# Altium PCB LED_Emergency_warning_lights.PcbDoc
Units mm, origin at the board's own origin, x right, y up, seen from the top; angles counter-clockwise.
Board outline 40 x 20 mm, 2 copper layers (Top Layer, Bottom Layer), stack 1.57 mm thick; 9 components, 6 nets, 24 pads, 10 vias.
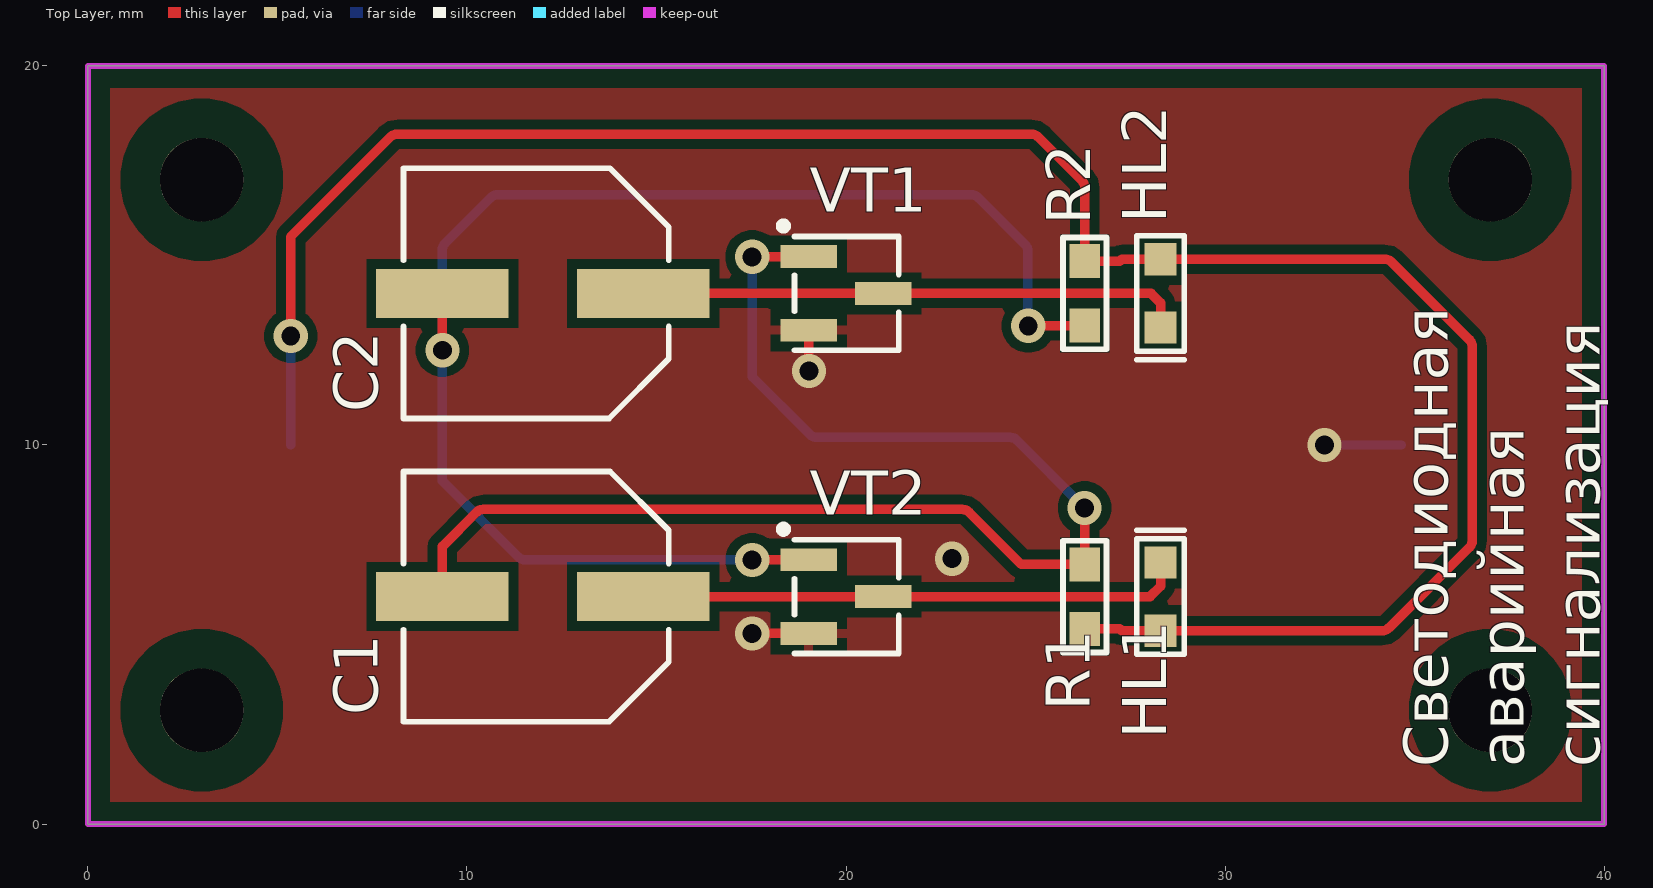
[diagram p0: Top Layer view]
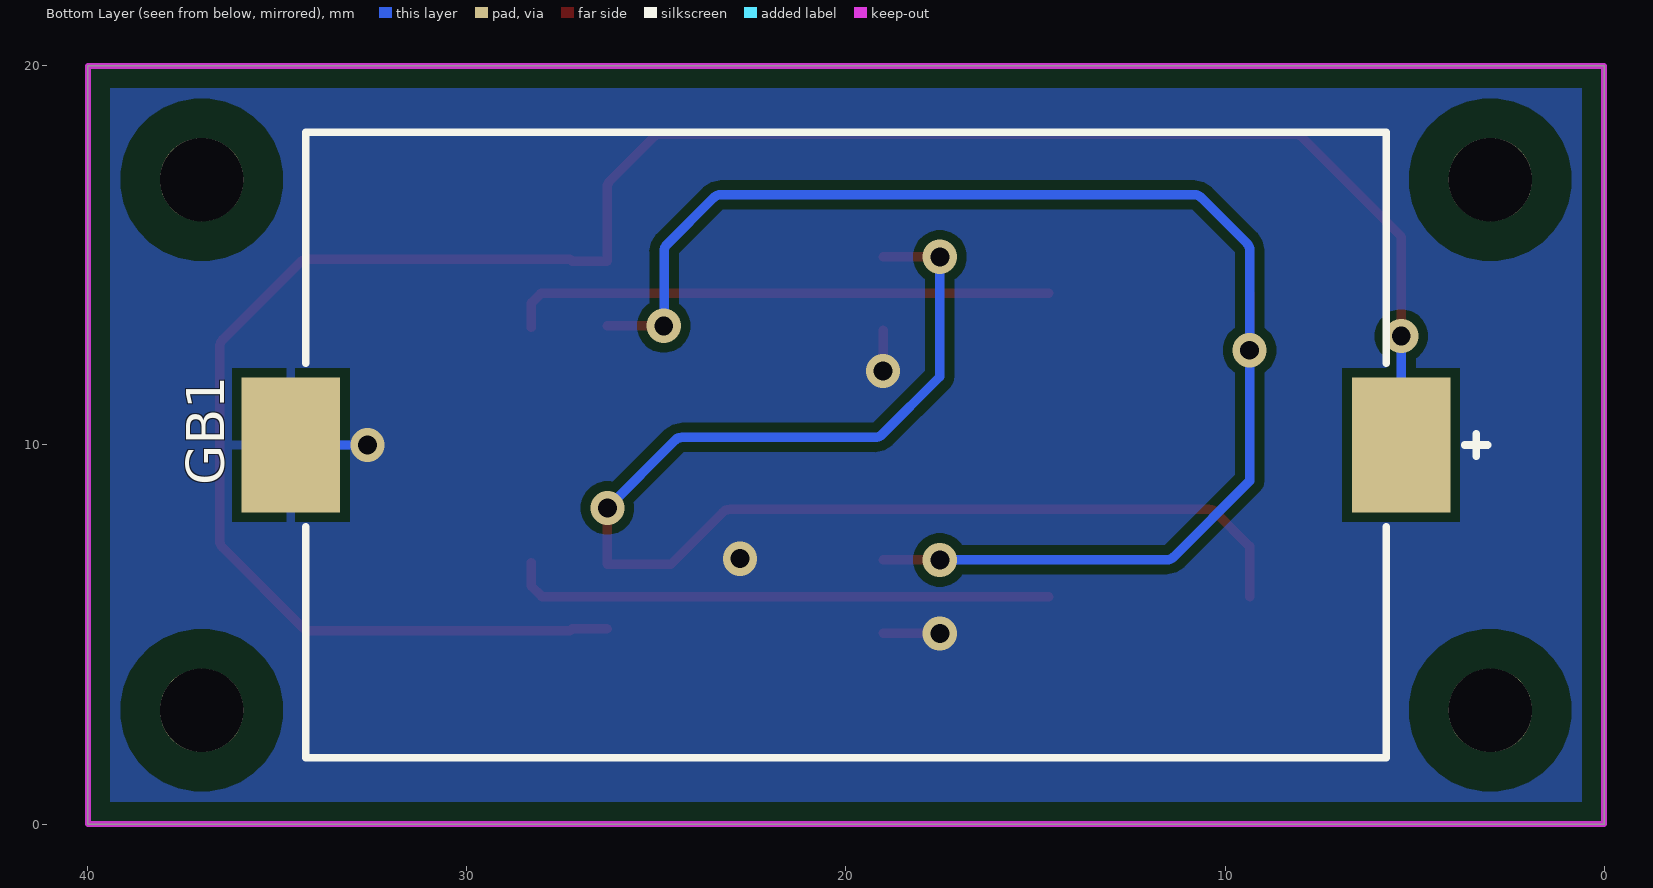
[diagram p1: Bottom Layer view, seen from below]
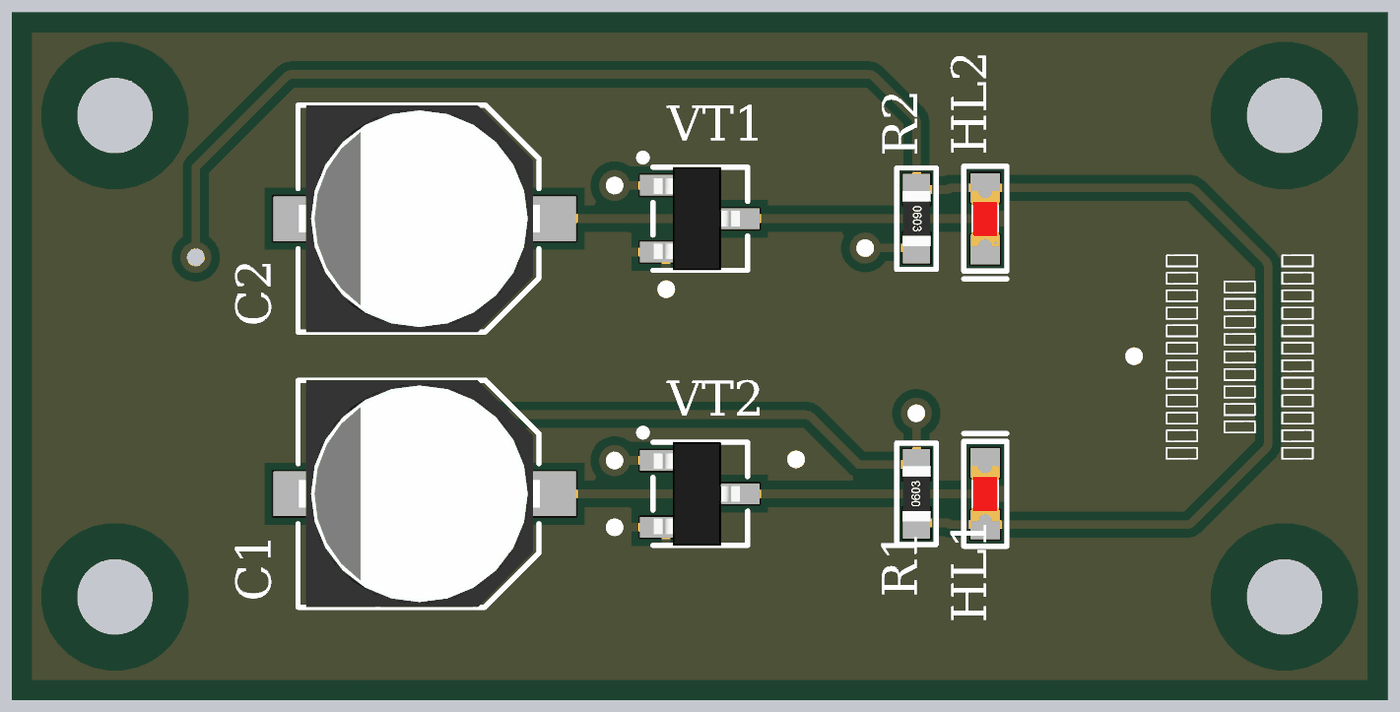
[diagram p2: 3D render of the assembled board from above, using the file's embedded part models]

## Layer stack, top to bottom
Top Solder: solder mask 0.025, Solder Resist, Dk 3.5
Top Layer: signal copper 0.035
Dielectric 1: dielectric 1.5, FR-4, Dk 4.8
Bottom Layer: signal copper 0.035
Bottom Solder: solder mask 0.025, Solder Resist, Dk 3.5

## Board outline
0,0 40,0 40,20 0,20

## Design rules (kind name [scope] priority, off if disabled: settings)
AcuteAngle [All] p1: minimum=6.00000000000000E+0001 checktracksonly=FALSE
Clearance Clearance_KeepOutLayer [OnLayer('Keep-Out Layer')] p1: gap=0.5 ignorepadtopadclearanceinfootprint=FALSE
Clearance [All] p2: gap=0.25 ignorepadtopadclearanceinfootprint=FALSE
ComponentClearance [All] p1: gap=0.2 collisioncheckmode=3 verticalgap=0.2 showdistances=FALSE
HoleSize [All] p1: absolutevalues=TRUE maxlimit=3.2 minlimit=0.3 maxpercent=80.000 minpercent=20.000
HoleToHoleClearance [All] p1: gap=0.3 allowstackedmicrovias=TRUE
Length [All] p1: maxlimit=2540 minlimit=0
MatchedLengths [InDifferentialPair('No Differential Pair')] p1: tolerance=25.4 checknetsindiffpair=FALSE checkdiffpairvsdiffpair=TRUE checkxsignals=TRUE checkothers=TRUE
MaximumViaCount [All] p1: limit=1000
MinimumAnnularRing [All] p1: minimumring=0.1
MinimumSolderMaskSliver [All] p1: minsoldermaskwidth=0.15
ParallelSegment [All] p1: limit=254 gap=0.254
PolygonConnect PolygonConnect_Via [IsVia] p1: connectstyle=Direct reliefconductorwidth=0.254 reliefentries=4 polygonreliefangle="90 Angle" airgapwidth=0.254
PolygonConnect [All] p2: connectstyle=Relief reliefconductorwidth=0.25 reliefentries=4 polygonreliefangle="90 Angle" airgapwidth=0.25
RoutingVias [All] p1: holewidth=0.5 width=0.9 viastyle="Through Hole" minholewidth=0.5 minwidth=0.9 maxholewidth=0.5 maxwidth=0.9
SMDEntry [All] p1: side=TRUE corner=TRUE anyangle=FALSE
SMDNeckDown [All] p1: percent=100.000
SMDToCorner [All] p1: distance=0
SMDToPlane [All] p1: distance=0
SilkToSilkClearance [All] p1: silktosilkclearance=0
SilkToSolderMaskClearance [IsPad] p1: minsilkscreentomaskgap=0 clearancetoexposedcopper=FALSE
SolderMaskExpansion [All] p1: expansion=0.05 istentingtop=FALSE
StubLength [All] p1: limit=25.4
SupplyNets "Schematic Supply Nets_1" [InNet('+3V')] p1: voltage=0.000
SupplyNets "Schematic Supply Nets" [InNet('GND')] p2: voltage=0.000
ViasUnderSMD [All] p1: allowed=FALSE
Width [All] p1: maxlimit=5 minlimit=0.25 preferedwidth=0.25
24 further rules are at their usual default settings.

## Components (designator, comment, footprint, x,y, rotation, side; value= is the part's Value field where it differs from the comment)
C1 "" 0607_ELECTR_CAP 12,6 r90 top value=47мк
C2 "" 0607_ELECTR_CAP 12,14 r90 top value=47мк
GB1 "Battery" FP-653-MFG 20,10 r180 bottom value=BA2032SM
HL1 "" 0603_LED_RED 28.3,6 r90 top value=Красный
HL2 "" 0603_LED_RED 28.3,14 r270 top value=Красный
R1 "" 0603_RES 26.3,6 r90 top value=47к
R2 "" 0603_RES 26.3,14 r270 top value=47к
VT1 "BC848B" SOT-23 20,14 r0 top
VT2 "BC848B" SOT-23 20,6 r0 top

## Footprints (in the part's own frame and the unit in brackets; to place one, negate y for a bottom-side part, rotate by r counter-clockwise, add the part's x,y. Pads: shape width x height; smd on the part's side, far side on the other; paste and mask are expansions set on the pad)
0603_LED_RED [mm]
  rect 0.85x0.85 smd: A(-0.9,0) K(0.9,0)
  silkscreen extent -1.53,-0.63 1.75,0.62, body extent -0.8,-0.4 0.8,0.4, height 0.6
0603_RES [mm]
  rect 0.9x0.8 smd: 1(-0.85,0) 2(0.85,0)
  silkscreen extent -1.48,-0.58 1.47,0.57, body extent -0.8,-0.41 0.8,0.41, height 0.45
0607_ELECTR_CAP [mm]
  rect 1.3x3.5 smd: 1(0,-2.65) 2(0,2.65)
  silkscreen extent -3.3,-3.33 3.3,3.67, body extent -3.3,-3.35 3.3,3.65, height 8.11
FP-653-MFG [mm]
  rect 2.6x3.56 smd paste+0 mask+0: N(-14.65,0) P(14.65,0)
  silkscreen extent -14.25,-8.25 16.93,8.25, body extent -16,-8 16,8, height 6.7
SOT-23 [mm]
  rect 1.5x0.6 smd: 1(-0.984,0.971) 2(-0.984,-0.97) 3(0.984,0)
  silkscreen extent -1.75,-1.5 1.39,1.88, body extent -1.33,-1.5 1.17,1.5, height 1.1

## Part data
C1 C2: library part Capacitor_pol, Case=0607, Tolerance=20%, ValueDescription="Конденсатор полярный 0607 47мкФ±20% 35 В", ValueType="Конденсатор полярный", Voltage=35
GB1: ValueDescription="Батарейный отсек BA2032SM Каталог MPD", ValueManufacturer=MPD, ValueManufacturerPartNumber=BA2032SM, ValueType="Батарейный отсек"
HL1 HL2: library part Led_red, Case=0603, Temp=-40C...+85C, ValueDescription="Светодиод FYLS-0603URC Каталог Foryard", ValueManufacturer=Foryard, ValueManufacturerPartNumber=FYLS-0603URC, ValueType=Светодиод
R1 R2: library part Resistor, Case=0603, Power=0,1, Tolerance=1%, ValueDescription="Резистор 0603 47кОм ±1% 0,1 Вт", ValueManufacturerPartNumber=RC0603FR-0747KL, ValueType=Резистор
VT1 VT2: library part NPN_BEC, Case=SOT-23, ValueDescription="Биполярный транзистор BC848B,215 Каталог Nexperia B.V.", ValueManufacturer="Nexperia B.V.", ValueManufacturerPartNumber=BC848B,215, ValueType="Биполярный транзистор"

## Free pads (board coordinates)
  round 2.2 hole 2.2 unplated mask+0: ""(3,3) ""(3,17) ""(37,3) ""(37,17)

## Via types
v1: diameter 0.9, hole 0.5, Top Layer to Bottom Layer, tented both sides, 10 vias

## Nets (pads, with @x,y where several pads share a name; then routed paths per layer and width w, separated by ;. In a path a pad name is that pad's centre, name@x,y a point inside that pad or via, vN(x,y) a via of type N, cw(c..) or ccw(c..) an arc to the next point about the centre after c; other vN are vias at no path point)
+3V: GB1.P HL1.A HL2.A R1.1 R2.1 | length 57.8
  Top Layer w0.25: v1(5.35,12.875) 5.35,15.5 7.977,18.127 cw(c8.154,17.95) 8.154,18.2 24.896,18.2 cw(c24.896,17.95) 25.046,18.15 cw(c24.896,17.95) 25.073,18.127 26.227,16.973 cw(c26.05,16.796) 26.25,16.946 cw(c26.05,16.796) 26.3,16.796 26.3,15.3 R2.1 27.225,14.85 27.275,14.9 27.875,14.9 HL2.A 34.221,14.9 cw(c34.221,14.65) 34.398,14.827 36.452,12.773 cw(c36.275,12.596) 36.525,12.596 36.525,7.479 cw(c36.275,7.479) 36.452,7.302 34.323,5.173 cw(c34.146,5.35) 34.146,5.1 28.725,5.1 HL1.A 27.275,5.1 27.225,5.15 26.7,5.15 R1.1
  Bottom Layer w0.25: GB1.P v1(5.35,12.875)
GND: GB1.N VT1.2 VT2.2 | length 4.6
  Top Layer w0.25: v1(17.525,5.025) 17.53,5.03 VT2.2 ; VT1.2 19.016,11.959 v1(19.025,11.95)
  Bottom Layer w0.25: v1(32.625,10) GB1.N
  other v1: 22.8,7
NetC1_1: C1.1 HL1.K VT2.3 | length 14.4
  Top Layer w0.25: C1.1 20.234,6 VT2.3 28.025,6 28.3,6.275 28.3,6.475 HL1.K
NetC1_2: C1.2 R1.2 VT1.1 | length 35.6
  Top Layer w0.25: C1.2 9.35,7.325 10.252,8.227 cw(c10.429,8.05) 10.429,8.3 23.071,8.3 cw(c23.071,8.05) 23.248,8.227 24.625,6.85 25.9,6.85 R1.2 v1@26.3,8.336 ; v1@17.53,14.971 VT1.1
  Bottom Layer w0.25: v1(17.525,14.966) 17.525,11.8 19.052,10.273 ; 19.053,10.272 ccw(c19.229,10.45) 19.229,10.2 24.333,10.2 cw(c24.333,9.95) 24.51,10.127 v1(26.296,8.341)
NetC2_1: C2.1 HL2.K VT1.3 | length 14.4
  Top Layer w0.25: C2.1 20.234,14 VT1.3 28.05,14 28.3,13.75 28.3,13.525 HL2.K
NetC2_2: C2.2 R2.2 VT2.1 | length 38.2
  Top Layer w0.25: v1(9.35,12.5) C2.2 ; v1@17.53,6.971 VT2.1 ; v1@24.813,13.15 R2.2
  Bottom Layer w0.25: 11.352,7.048 9.35,9.05 v1(9.35,12.5) 9.35,15.146 cw(c9.6,15.146) 9.423,15.323 10.627,16.527 cw(c10.804,16.35) 10.804,16.6 23.312,16.6 cw(c23.312,16.35) 23.488,16.527 24.727,15.288 cw(c24.55,15.112) 24.8,15.112 24.8,13.155 v1(24.809,13.146) ; 11.353,7.047 ccw(c11.529,7.225) 11.529,6.975 v1@17.45,6.975
  other v1: 17.525,6.966

## Polygon pours and split planes (outlines as drawn)
GND on Bottom Layer "Top Layer-GND" (solid, remove dead copper, pour order 1): 0.25,0.25 0.25,19.75 39.75,19.75 39.75,0.25
GND on Top Layer "Top Layer-GND" (solid, remove dead copper, pour order 0): 0.25,0.25 0.25,19.75 39.75,19.75 39.75,0.25

## Keep-outs
Keep-Out Layer:
  the board outline again, w0.15

## Other copper
Top Layer:
  pour cut-out: 34.86,17 ccw(c37,17) 37,14.86 ccw(c37,17) 39.14,17 ccw(c37,17) 37,19.14 ccw(c37,17)
  pour cut-out: 34.86,3 ccw(c37,3) 37,0.86 ccw(c37,3) 39.14,3 ccw(c37,3) 37,5.14 ccw(c37,3)
  pour cut-out: 0.86,3 ccw(c3,3) 3,0.86 ccw(c3,3) 5.14,3 ccw(c3,3) 3,5.14 ccw(c3,3)
  pour cut-out: 0.86,17 ccw(c3,17) 3,14.86 ccw(c3,17) 5.14,17 ccw(c3,17) 3,19.14 ccw(c3,17)
Bottom Layer:
  pour cut-out: 34.86,17 ccw(c37,17) 37,14.86 ccw(c37,17) 39.14,17 ccw(c37,17) 37,19.14 ccw(c37,17)
  pour cut-out: 34.86,3 ccw(c37,3) 37,0.86 ccw(c37,3) 39.14,3 ccw(c37,3) 37,5.14 ccw(c37,3)
  pour cut-out: 0.86,3 ccw(c3,3) 3,0.86 ccw(c3,3) 5.14,3 ccw(c3,3) 3,5.14 ccw(c3,3)
  pour cut-out: 0.86,17 ccw(c3,17) 3,14.86 ccw(c3,17) 5.14,17 ccw(c3,17) 3,19.14 ccw(c3,17)

## Silkscreen, mask and mechanical layers (free items; w line width, h text height)
Top Overlay:
  text "Светодиодная / аварийная / сигнализация" at 40.266,1.498 h2 r90